# Altium PCB Boost Converter.PcbDoc
Units mil, origin at the board's own origin, x right, y up, seen from the top; angles counter-clockwise.
Board outline 3620 x 3150 mil, 2 copper layers (Top Layer, Bottom Layer); 28 components, 20 nets, 74 pads, 0 vias.
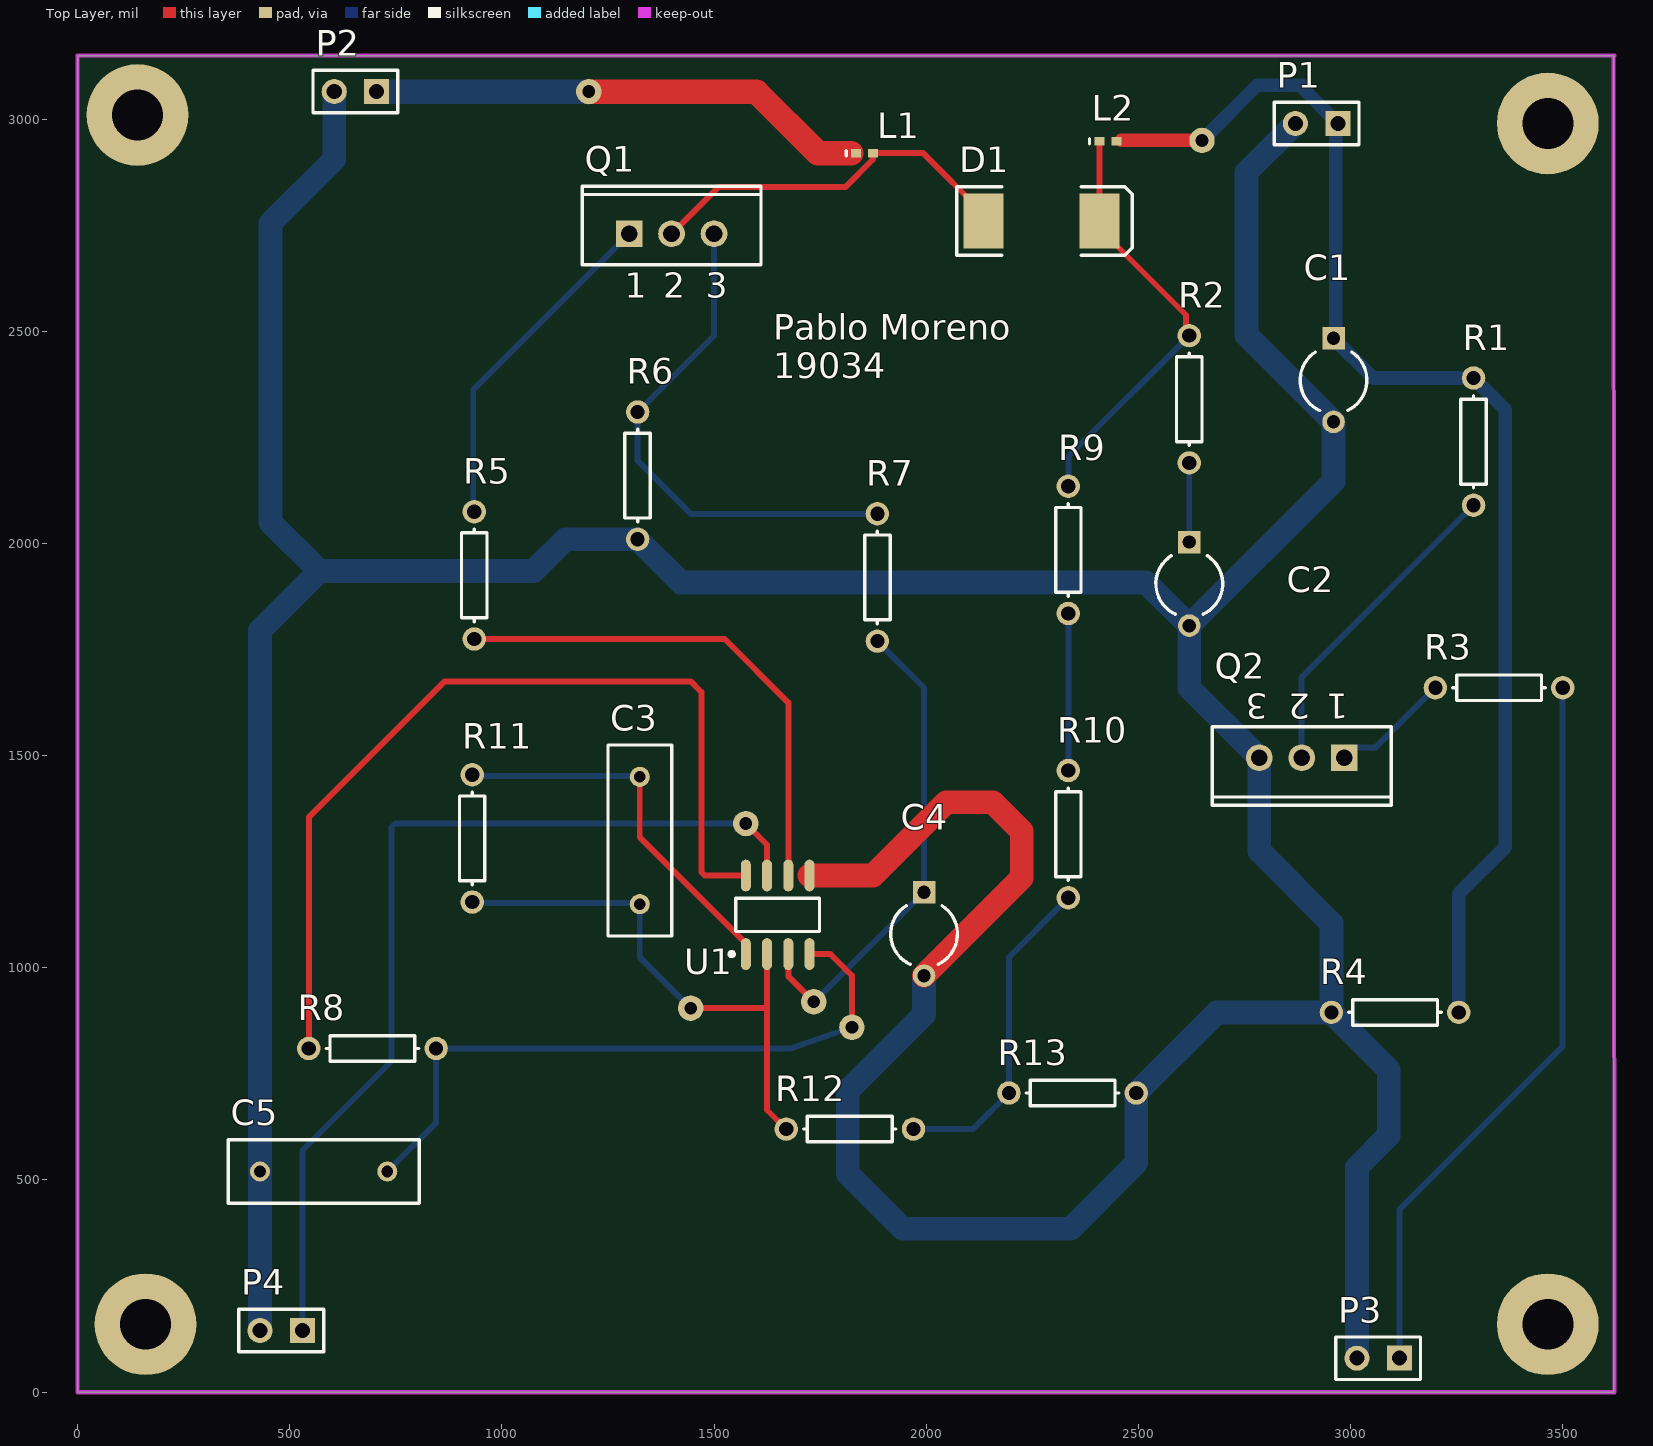
[diagram p0: Top Layer view]
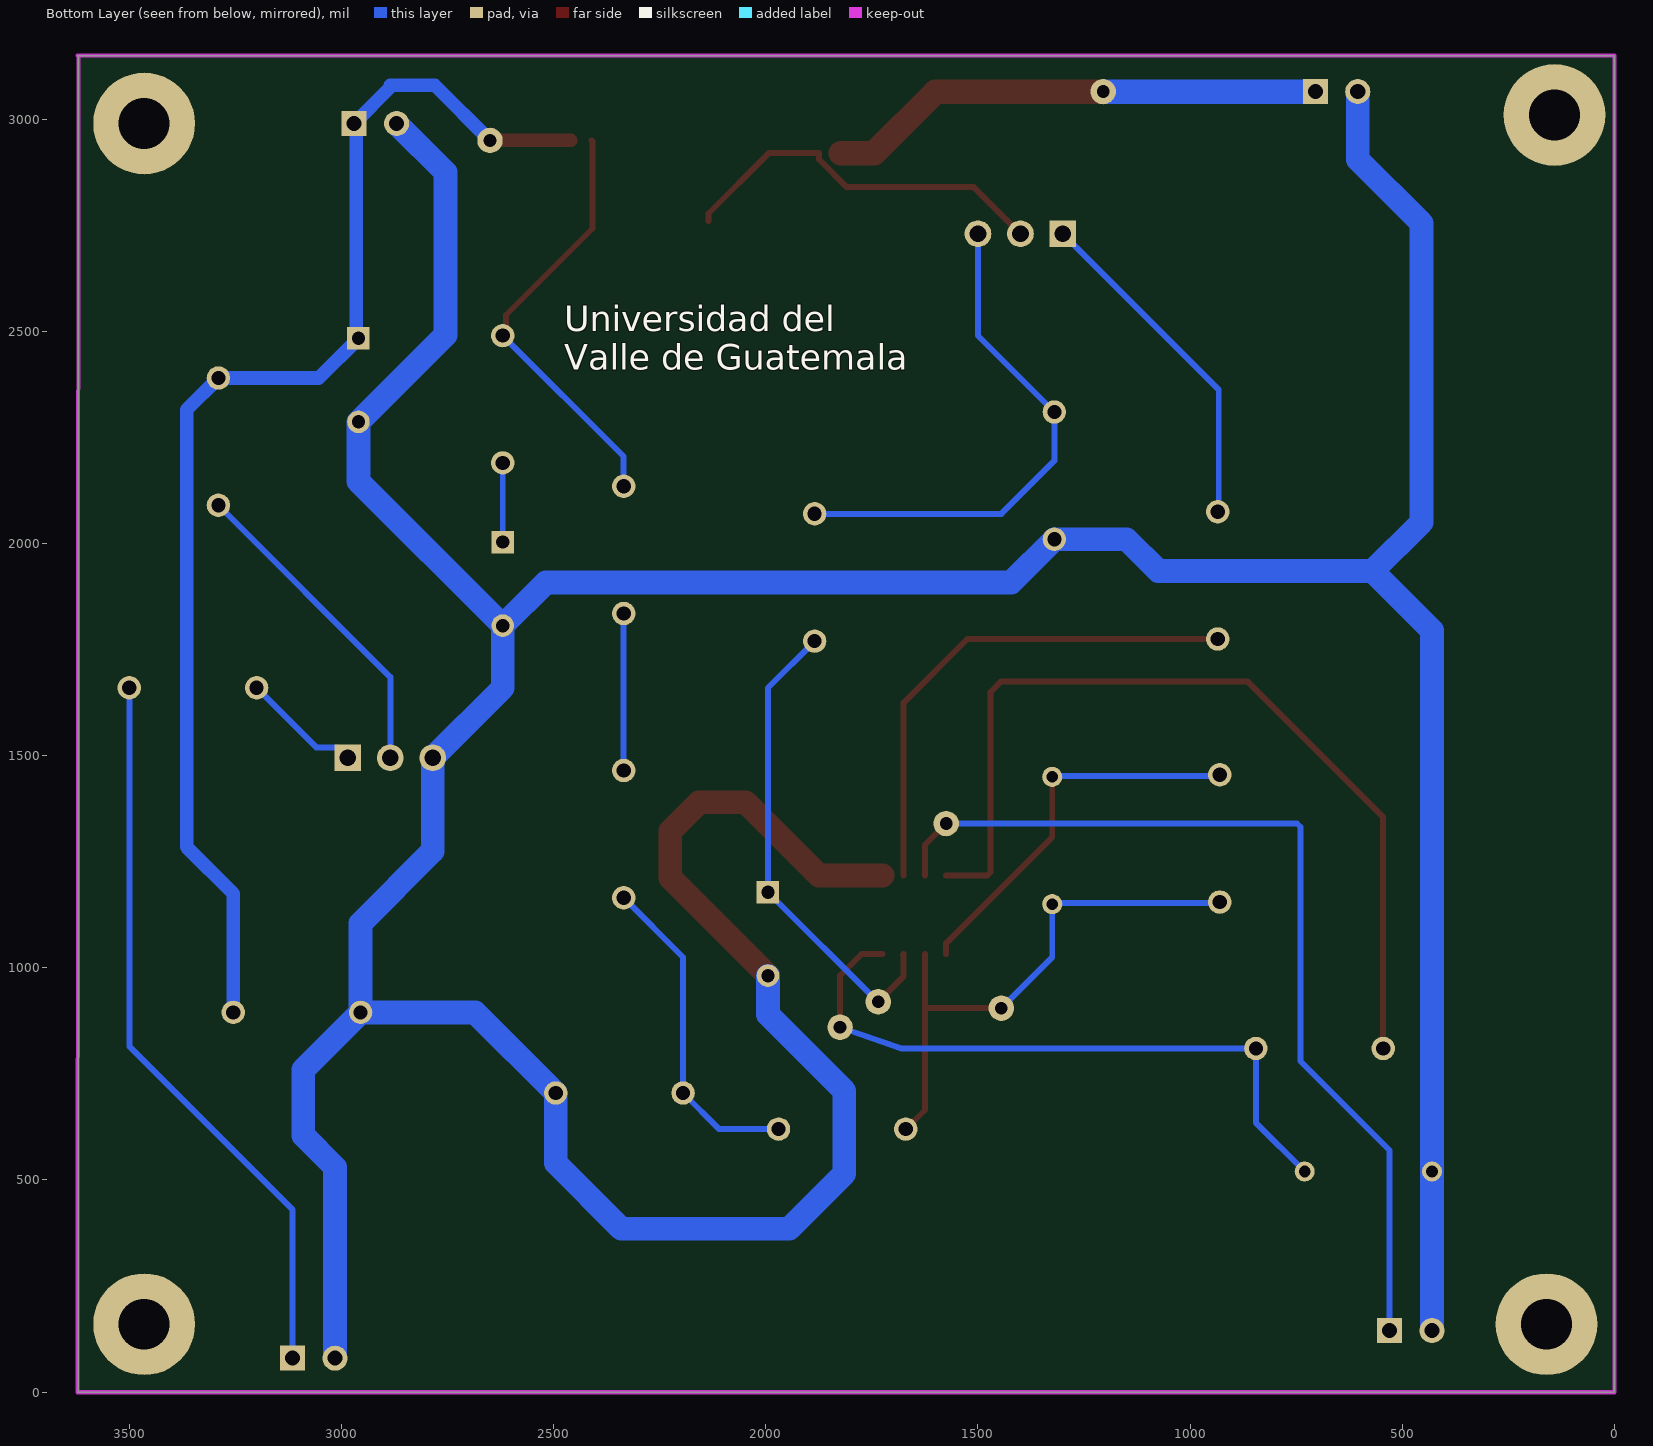
[diagram p1: Bottom Layer view, seen from below]
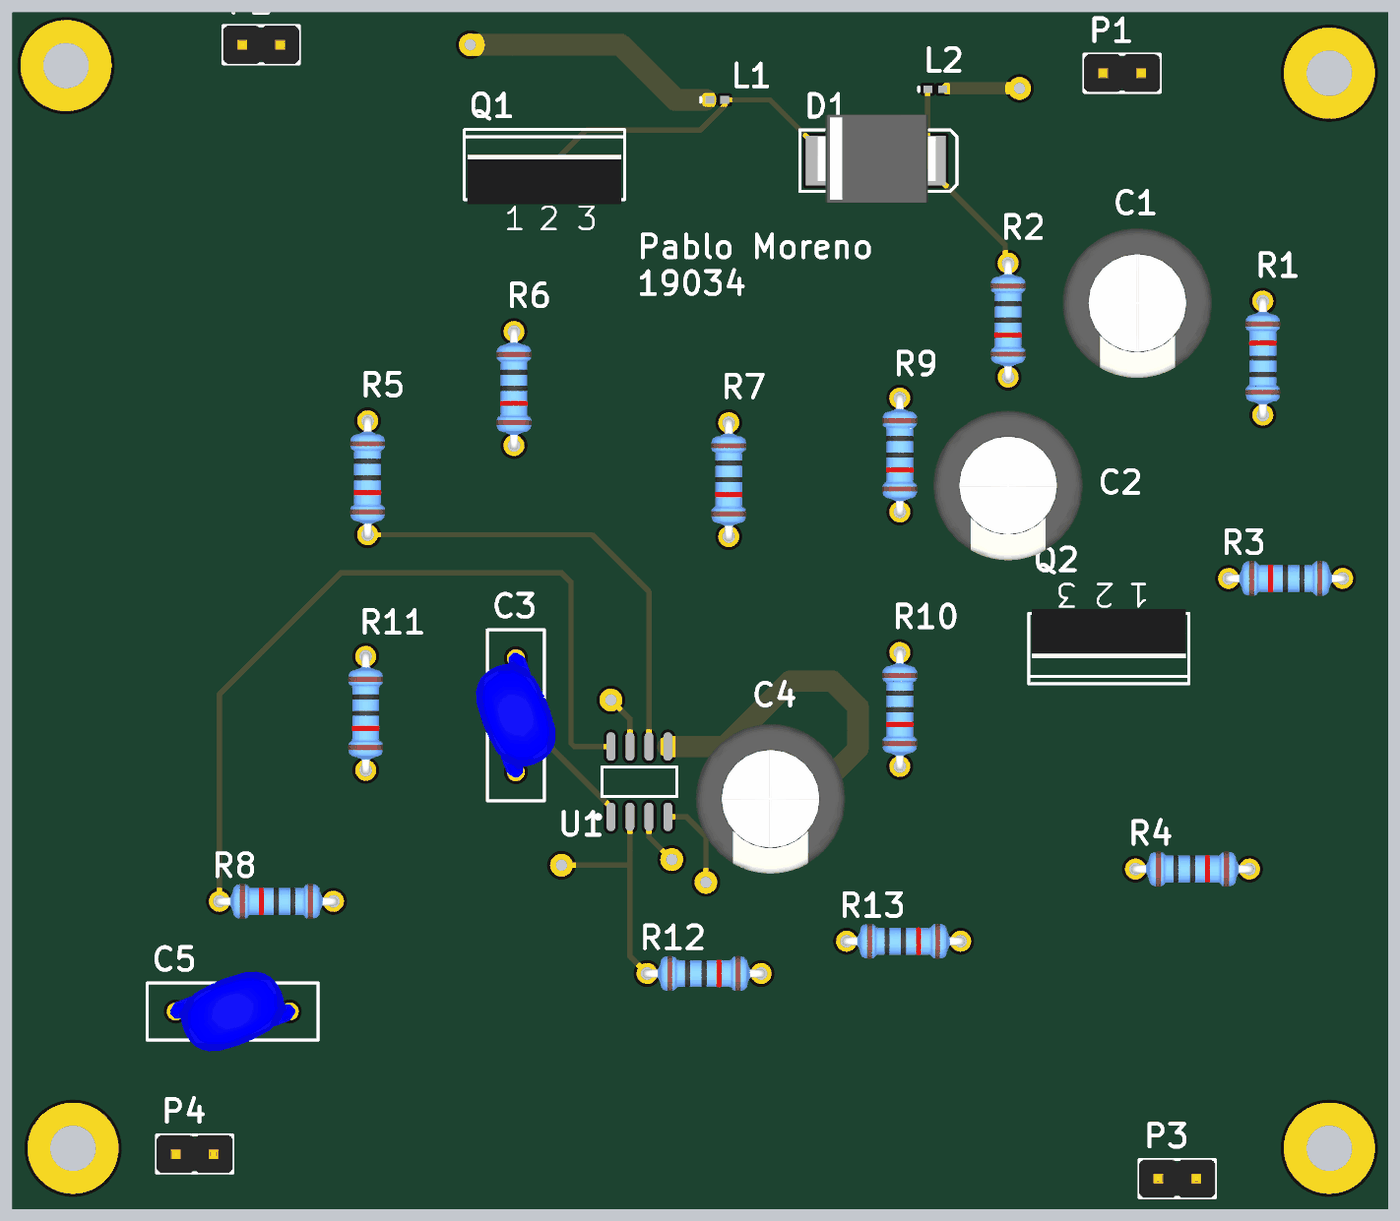
[diagram p2: 3D render of the assembled board from above, using the file's embedded part models]

## Layer stack, top to bottom
Top Solder: solder mask 0.4, Solder Resist, Dk 3.5
Top Layer: signal copper 1.4
Dielectric 1: dielectric 12.6, FR-4, Dk 4.8
Bottom Layer: signal copper 1.4
Bottom Solder: solder mask 0.4, Solder Resist, Dk 3.5

## Board outline
0,0 0,3150 3620,3150 3620,0

## Design rules (kind name [scope] priority, off if disabled: settings)
Clearance General [All] p1: gap=10 ignorepadtopadclearanceinfootprint=FALSE
Clearance "Separacion Q2" [InNet('NetQ2_1') vs InNet('NetQ2_2')] p2: gap=30.2 ignorepadtopadclearanceinfootprint=FALSE
Clearance "Separacion Q1" [InNet('NetQ1_1') vs InNet('NetQ1_3')] p3: gap=30.2 ignorepadtopadclearanceinfootprint=FALSE
Clearance "Separacion V_OUT" [All] p4: gap=24 ignorepadtopadclearanceinfootprint=FALSE
Clearance "Separación GND" [InNet('GND')] p5: gap=30.2 ignorepadtopadclearanceinfootprint=FALSE
Clearance "Separacion VIN3" [InNet('VIN3')] p6: gap=26.3 ignorepadtopadclearanceinfootprint=FALSE
Clearance "Separacion VIN2" [InNet('VIN2')] p7: gap=26 ignorepadtopadclearanceinfootprint=FALSE
Clearance "Separacion VIN1" [InNet('VIN1')] p8: gap=32.2 ignorepadtopadclearanceinfootprint=FALSE
ComponentClearance [All] p1: gap=16 collisioncheckmode=3 verticalgap=0 showdistances=FALSE
ComponentOrientations [All] p1: allowedrotations=32
HoleSize [All] p1: absolutevalues=TRUE maxlimit=125 minlimit=16 maxpercent=80.000 minpercent=20.000
HoleToHoleClearance [All] p1: gap=16 allowstackedmicrovias=TRUE
MinimumAnnularRing [All] p1: minimumring=10
MinimumSolderMaskSliver [All] p1: minsoldermaskwidth=8
PermittedLayers [All] p1: toplayerpermitted=TRUE bottomlayerpermitted=FALSE
PolygonConnect [All] p1: connectstyle=Relief reliefconductorwidth=10 reliefentries=4 polygonreliefangle="90 Angle" airgapwidth=10
RoutingVias RoutingVias_ALL [All] p1: holewidth=28 width=54 viastyle="Through Hole" minholewidth=16 minwidth=16 maxholewidth=125 maxwidth=125
SMDEntry [All] p1: side=TRUE corner=TRUE anyangle=FALSE
SilkToSilkClearance [All] p1: silktosilkclearance=0
SilkToSolderMaskClearance [IsPad] p1: minsilkscreentomaskgap=0 clearancetoexposedcopper=TRUE
SolderMaskExpansion [All] p1: expansion=8
UnRoutedNet [All] p1: checkbadconnections=TRUE
ViasUnderSMD [All] p1: allowed=FALSE
Width Width_VOUT [InNet('V_OUT')] p1: maxlimit=10000 minlimit=32 preferedwidth=32
Width Width_VIN1 [InNet('VIN1')] p2: maxlimit=10000 minlimit=56 preferedwidth=58
Width Width_GND [InNet('GND')] p3: maxlimit=10000 minlimit=56 preferedwidth=56
Width Width_ALL [All] p4: maxlimit=10000 minlimit=14 preferedwidth=14
23 further rules are at their usual default settings.

## Components (designator, comment, footprint, x,y, rotation, side; value= is the part's Value field where it differs from the comment)
C1 "Cap Elec (L1-3)" CAPR5-4X5 2960,2385 r270 top
C2 "Cap Elec (L1-3)" CAPR5-4X5 2620,1905 r270 top
C3 "Cap" RAD-0.3 1325,1300 r270 top value=3n
C4 "Cap Elec (L1-3)" CAPR5-4X5 1995,1080 r270 top
C5 "Cap" RAD-0.3 580,520 r180 top value=2n
D1 "BYW80-200" SMC 2271.81,2760 r0 top
L1 "Lossy Inductor" 0402-A 1854.68,2920 r0 top value=200u
L2 "Lossy Inductor" 0402-A 2428.31,2947.99 r0 top value=5u
P1 "Header 2" HDR1X2 2970,2990 r180 top
P2 "Header 2" HDR1X2 705,3065 r180 top
P3 "Header 2" HDR1X2 3115,80 r180 top
P4 "Header 2" HDR1X2 530,145 r180 top
Q1 "IRF530" TO-220AB 1400,2730 r0 top
Q2 "IRF530" TO-220AB 2885,1495 r180 top
R1 "Res1" AXIAL-0.3 3290,2240 r270 top value=10
R2 "Res1" AXIAL-0.3 2620,2340 r90 top value=100m
R3 "Res1" AXIAL-0.3 3350,1660 r0 top value=1k
R4 "Res1" AXIAL-0.3 3105,895 r180 top value=24
R5 "Res1" AXIAL-0.3 935,1925 r90 top value=50
R6 "Res1" AXIAL-0.3 1320,2160 r90 top value=75m
R7 "Res1" AXIAL-0.3 1885,1920 r90 top value=1k
R8 "Res1" AXIAL-0.3 695,810 r0 top value=18k
R9 "Res1" AXIAL-0.3 2335,1985 r90 top value=7.5k
R10 "Res1" AXIAL-0.3 2335,1315 r90 top value=2.75k
R11 "Res1" AXIAL-0.3 930,1305 r90 top value=400k
R12 "Res1" AXIAL-0.3 1820,620 r180 top value=5k
R13 "Res1" AXIAL-0.3 2345,705 r180 top value=560
U1 "UC3842" SO8_L 1650,1125 r90 top

## Footprints (in the part's own frame and the unit in brackets; to place one, negate y for a bottom-side part, rotate by r counter-clockwise, add the part's x,y. Pads: shape width x height; smd on the part's side, far side on the other; paste and mask are expansions set on the pad)
0402-A [mm] "Chip Inductor, Body 1.0x0.5mm, IPC High Density"
  rect 0.6x0.5 smd: 1(-0.5,0) 2(0.5,0)
  silkscreen extent -1.1,-0.15 -1.1,0.15, body extent -0.55,-0.3 0.55,0.3, height 0.55
AXIAL-0.3 [mm] "Axial Device, Thru-Hole; 2 Leads; 0.3 in Pin Spacing"
  round 1.4 hole 0.85: 1(-3.81,0) 2(3.81,0)
  silkscreen extent -2.77,-0.76 2.77,0.76, body extent -4.08,-2.79 4.08,1.17, height 2.47
CAPR5-4X5 [mm] "Capacitor; 2 Leads"
  rect 1.35x1.35 hole 0.8: 1(-2.5,0)
  round 1.35 hole 0.8: 2(2.5,0)
  silkscreen extent -1.69,-2 1.82,2, body extent -5,-5 5,5, height 16
HDR1X2 [mm] "Connector; Header; 2 Position"
  rect 1.5x1.5 hole 0.9: 1(0,0)
  round 1.5 hole 0.9: 2(2.54,0)
  silkscreen extent -1.27,-1.27 3.81,1.27, body extent -1.27,-1.78 3.81,1.27, height 8.89
RAD-0.3 [mm] "Radial Cap, Thru-Hole; 2 Leads; 0.3 in Pin Spacing"
  round 1.2 hole 0.7: 1(-3.81,0) 2(3.81,0)
  silkscreen extent -5.71,-1.91 5.71,1.91, body extent -4.22,-2.67 4.22,2.66, height 8.3
SMC [mm] "DO-214-AB/SMC; 2 C-Bend Leads; Body 7.9 x 5.9 mm, inc. leads (LxW)"
  rect 2.4x3.3 smd: 1(-3.475,0) 2(3.475,0)
  silkscreen extent -5.07,-2.05 5.43,2.05, body extent -3.91,-2.83 4.03,3.08, height 2.27
SO8_L [mm] "SOIC, 8-Leads, Body 4.9x3.9mm, Pitch 1.27mm, IPC High Density"
  oval 1.9x0.6 smd: 1(-2.35,1.905) 2(-2.35,0.635) 3(-2.35,-0.635) 4(-2.35,-1.905) 5(2.35,-1.905) 6(2.35,-0.635) 7(2.35,0.635) 8(2.35,1.905)
  silkscreen extent -2.47,-2.5 1,2.88, body extent -2,-2.5 2,2.5, height 1.75
TO-220AB [mm] "TO, Thru-Hole, Vertical, Heatsink Mounted; 3 In-Line Leads; Pitch 2.54 mm"
  rect 1.6x1.6 hole 1: 1(-2.54,0)
  round 1.6 hole 1: 2(0,0) 3(2.54,0)
  silkscreen extent -5.35,-1.85 5.35,2.85, body extent -6.22,-2.16 5.15,1.14, height 19.03

## Part data
C1 C2 C4: "Electrolytic Capacitor (Levels 1-3)", LEVEL=2, PackageReference=CAPR5-4X5, Published=23-Sep-2002, Publisher="Altium Limited"
  C1: CC=200u, RESR=20m, RSH_CC=100Meg
  C2: CC=470u, RESR=30m, RSH_CC=100Meg
  C4: CC=1n, RESR=50, RSH_CC=1G
C3 C5: "Capacitor", Initial Voltage=0, LatestRevisionDate=17-Jul-2002, LatestRevisionNote="Re-released for DXP Platform.", PackageReference=RAD-0.3, Published=8-Jun-2000, Publisher="Altium Limited"
D1: "High-Efficiency Fast Recovery Rectifier Diode", PackageDocument=Sep-1996, Code_JEDEC=DO-214-AB, LatestRevisionDate=17-Jul-2002, LatestRevisionNote="Re-released for DXP Platform.", PackageReference=SMC, Published=8-Jun-2000, Publisher="Altium Limited"
L1 L2: library part "Inductor (Lossy)", Code_IEC=1005, Code_JEITA=0402, LatestRevisionDate=17-Jul-2002, LatestRevisionNote="Re-released for DXP Platform.", PackageReference=0402-A, Published=8-Jun-2000, Publisher="Altium Limited", RSERIES=10m, RSHUNT=1G
P1 P2 P3 P4: "Header, 2-Pin", LatestRevisionDate=17-Jul-2002, LatestRevisionNote="Re-released for DXP Platform.", Publisher="Altium Limited"
Q1 Q2: "HEXFET N-Channel Power MOSFET", ComponentLink1Description="Manufacturer Link", ComponentLink1URL=http://www.irf.com/, ComponentLink2Description=Datasheet, ComponentLink2URL=http://www.irf.com/product-info/datasheets/data/irf530.pdf, DatasheetVersion=PD-9.307O, LatestRevisionDate=17-Jul-2002, LatestRevisionNote="Re-released for DXP Platform.", Note="Pin 2 is electrically connected to pin 4.", PackageDescription="TO, Thru-Hole, Vertical, Heatsink Mounted; 3 In-Line Leads; Pitch 2.54 mm", PackageReference=TO-220AB, PackageVersion=Feb-1997, Published=8-Jun-2000, Publisher="Altium Limited"
R1 R2 R3 R4 R5 R6 R7 R8 R9 R10 R11 R12 R13: "Resistor", LatestRevisionDate=17-Jul-2002, LatestRevisionNote="Re-released for DXP Platform.", PackageReference=AXIAL-0.3, Published=8-Jun-2000, Publisher="Altium Limited"
U1: "High-Performance Current Mode PWM Controller", Code_IPC=SOIC127P600-8, Code_JEDEC=MS-012-AA, ComponentLink1Description="Manufacturer Link", ComponentLink1URL=http://www.st.com/, ComponentLink2Description=Datasheet, ComponentLink2URL=http://www.st.com/stonline/products/literature/ds/4299/uc3842b.pdf, DatasheetVersion=Mar-1999, LatestRevisionDate=13-Apr-2006, LatestRevisionNote="IPC-7351 Footprint Added.", PackageDescription="8-Pin Small Outline Integrated Circuit 1.27 mm Pitch", PackageReference=SO8, PackageVersion=Dec-2002, Published=24-Aug-2001, Publisher="Altium Limited"

## Free pads (board coordinates)
  round 239.8 hole 120: 4(141.47,3010) 4(160,160) 4(3465,160) 4(3465,2990)
  round 60 hole 30: 5(2650,2950) 6(1205,3065) 8(1825,860) 9(1735,920) 11(1575,1340) 12(1445,905)

## Nets (pads, with @x,y where several pads share a name; then routed paths per layer and width w, separated by ;. In a path a pad name is that pad's centre, name@x,y a point inside that pad or via, vN(x,y) a via of type N, cw(c..) or ccw(c..) an arc to the next point about the centre after c; other vN are vias at no path point)
GND: C1.2 C2.2 C4.2 C5.2 P1.2 P2.2 P3.2 P4.2 Q2.3 R4.2 R6.1 R13.1 U1.5 | length 11740.5
  Top Layer w56: U1.5 1874.65,1217.52 2047.13,1390 2157.2,1390 2225,1322.2 2225,1211.58 C4.2
  Bottom Layer w56: P4.2 C5.2 430,1795 570,1935 ; P2.2 605,2905 455,2755 455,2050 570,1935 ; C4.2 1995,890 1815,710 1815,515 1945,385 2340,385 2495,540 R13.1 2685,895 R4.2 ; P1.2 2755,2875 2755,2491.57 C1.2 2960,2146.57 C2.2 ; P3.2 3015,530 3090,605 3090,760 R4.2 ; 570,1935 1075,1935 1150,2010 R6.1 1421.71,1908.29 2518.29,1908.29 C2.2 ; C2.2 2620,1660 Q2.3 2785,1275 2955,1105 R4.2
NetC2_1: C2.1 R2.1 | length 186.6
  Bottom Layer w14: C2.1 2620,2005 R2.1
NetC3_1: C3.1 R11.2 U1.1 | length 918.1
  Top Layer w14: C3.1 1325,1308.07 1575,1058.07 U1.1
  Bottom Layer w14: R11.2 932.5,1452.5 1322.5,1452.5 C3.1
NetC3_2: C3.2 pad.12 R11.1 R12.2 U1.2 | length 1302.9
  Top Layer w14: pad.12 1625,905 ; U1.2 1625,905 ; R12.2 1625,665 1625,905
  Bottom Layer w14: R11.1 932.5,1152.5 1322.5,1152.5 C3.2 1325,1025 pad.12
NetC4_1: C4.1 pad.9 R7.1 U1.3 | length 1144.1
  Top Layer w14: U1.3@1676.84,1030.64 U1.3 1675,980 pad.9
  Bottom Layer w14: pad.9 1736.58,920 C4.1 1995,1660 R7.1
NetC5_1: C5.1 pad.8 R8.2 U1.4 | length 1568.7
  Top Layer w14: U1.4 1774.09,1032.48 1825,981.57 pad.8
  Bottom Layer w14: C5.1 845,635 R8.2 1680,810 pad.8
NetD1_1: D1.1 L1.2 Q1.2 | length 899.1
  Top Layer w14: Q1.2 1510,2840 1809.37,2840 1874.37,2905 L1.2 1992.72,2920 2135,2777.72 D1.1
NetD1_2: D1.2 L2.1 R2.2 R9.2 | length 1021.4
  Top Layer w14: L2.1@2410.63,2950 L2.1 D1.2 2408.62,2742.28 2612.35,2538.56 2612.35,2497.65 R2.2
  Bottom Layer w14: R9.2 2335,2205 R2.2
NetQ1_1: Q1.1 R5.2 | length 807.2
  Bottom Layer w14: R5.2@932.5,2075 932.5,2362.5 Q1.1
NetQ1_3: Q1.3 R6.2 R7.2 | length 1226.3
  Bottom Layer w14: Q1.3 1500,2490 R6.2 1320,2195 1445,2070 R7.2
NetQ2_1: Q2.1 R3.1 | length 283.3
  Bottom Layer w14: Q2.1 3009.5,1519.5 3059.5,1519.5 R3.1
NetQ2_2: Q2.2 R1.2 | length 762.8
  Bottom Layer w14: Q2.2 2885,1685 R1.2
NetR5_1: R5.1 U1.6 | length 1209.6
  Top Layer w14: R5.1 1525,1775 1675,1625 U1.6
NetR8_1: R8.1 U1.8 | length 2145.6
  Top Layer w14: R8.1 545,1355 865,1675 1445,1675 1470,1650 1470,1225.72 1478.2,1217.52 U1.8
NetR9_1: R9.1 R10.2 | length 370
  Bottom Layer w14: R10.2 R9.1
NetR10_1: R10.1 R12.1 R13.2 | length 778.2
  Bottom Layer w14: R12.1 2110,620 R13.2 2195,1025 R10.1
V_OUT: C1.1 L2.2 P1.1 pad.5 R1.1 R4.1 | length 3055.1
  Top Layer w32: 2460,2950 pad.5
  Bottom Layer w32: pad.5 2780,3080 2885,3080 2885,3075 P1.1 2965,2985 2965,2488.43 C1.1 3053.43,2390 R1.1 3365,2315 3365,1285 3255,1175 R4.1
VIN1: L1.1 P2.1 pad.6 | length 1178.6
  Top Layer w58: pad.6 1600,3065 1745,2920 L1.1@1823.56,2920
  Bottom Layer w58: P2.1 pad.6
VIN2: P3.1 R3.2 | length 1746.5
  Bottom Layer w14: P3.1@3110,85 P3.1 3115,430 3500,815 R3.2
VIN3: P4.1 pad.11 U1.7 | length 2255.4
  Top Layer w14: pad.11@1565,1340 pad.11 1625,1290 U1.7
  Bottom Layer w14: P4.1 530,570 740,780 740,1331.8 748.2,1340 pad.11@1565,1340

## Keep-outs
Keep-Out Layer:
  lines w10: 0,3149.61 0,0 3622.05,0 ; 0,3150 3622.05,3150 ; 3620,3150 3622.05,0.39

## Silkscreen, mask and mechanical layers (free items; w line width, h text height)
Top Overlay:
  text "Pablo Moreno / 19034" at 1640,2390 h60
Bottom Overlay:
  text "Universidad del / Valle de Guatemala" at 2475,2410 h60

## Text inside footprints (layer, text, board x,y; h text height)
Q1: Top Overlay "3" at 1480.32,2579.41 h59.06; Top Overlay "1" at 1290.16,2579.41 h59.06; Top Overlay "2" at 1380.32,2579.41 h59.06
Q2: Top Overlay "2" at 2904.68,1645.59 h59.06 r180; Top Overlay "1" at 2994.84,1645.59 h59.06 r180; Top Overlay "3" at 2804.68,1645.59 h59.06 r180